# Altium PCB ST-LinkV2.PcbDoc
Units mm, origin at the board's own origin, x right, y up, seen from the top; angles counter-clockwise.
Board outline 48.5 x 21.03 mm, 2 copper layers (Top Layer, Bottom Layer); 39 components, 35 nets, 144 pads, 32 vias.
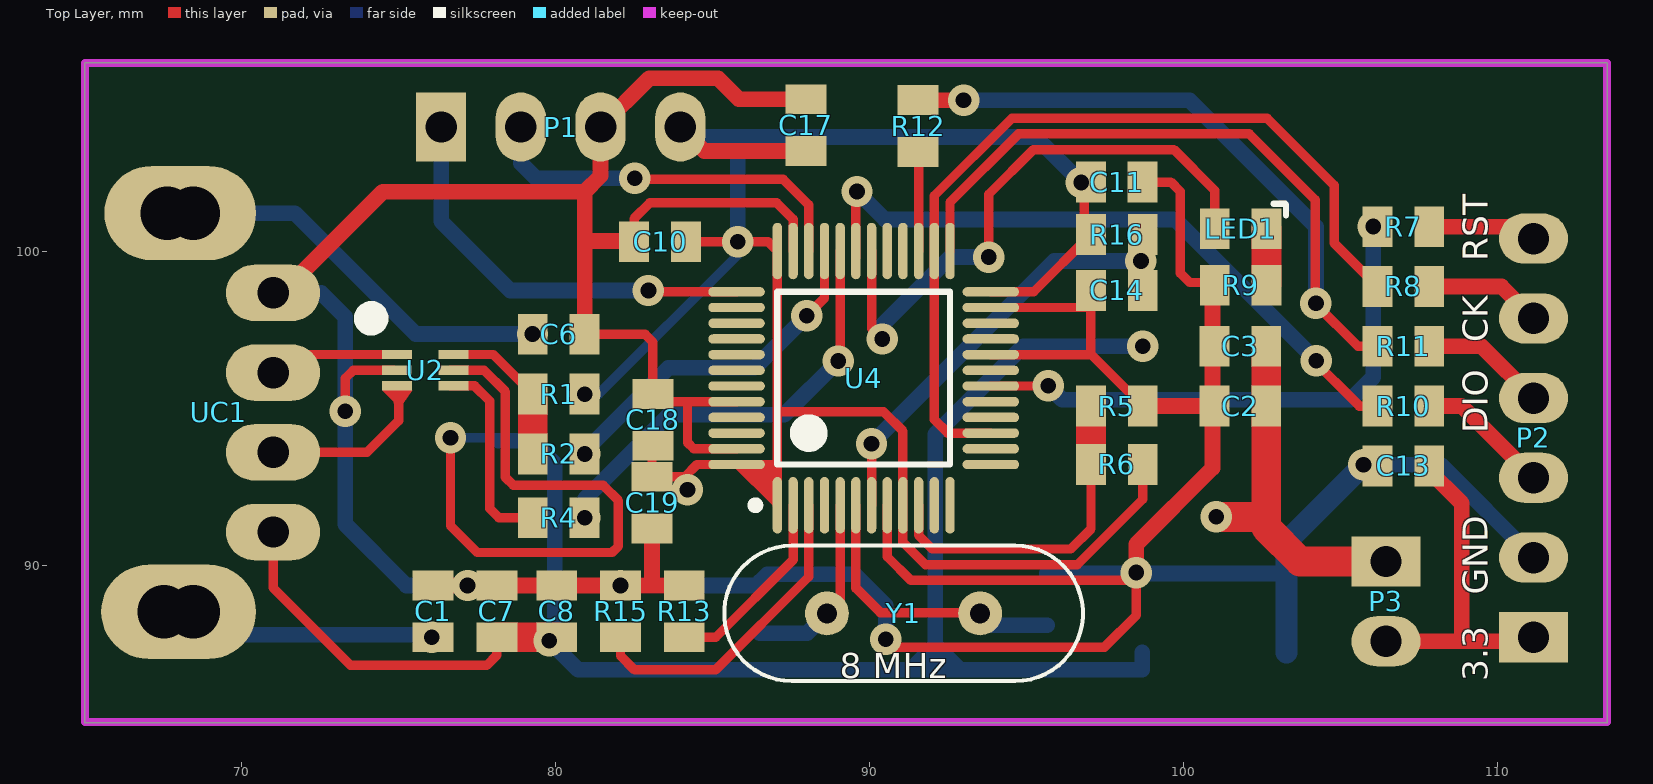
[diagram p0: Top Layer view]
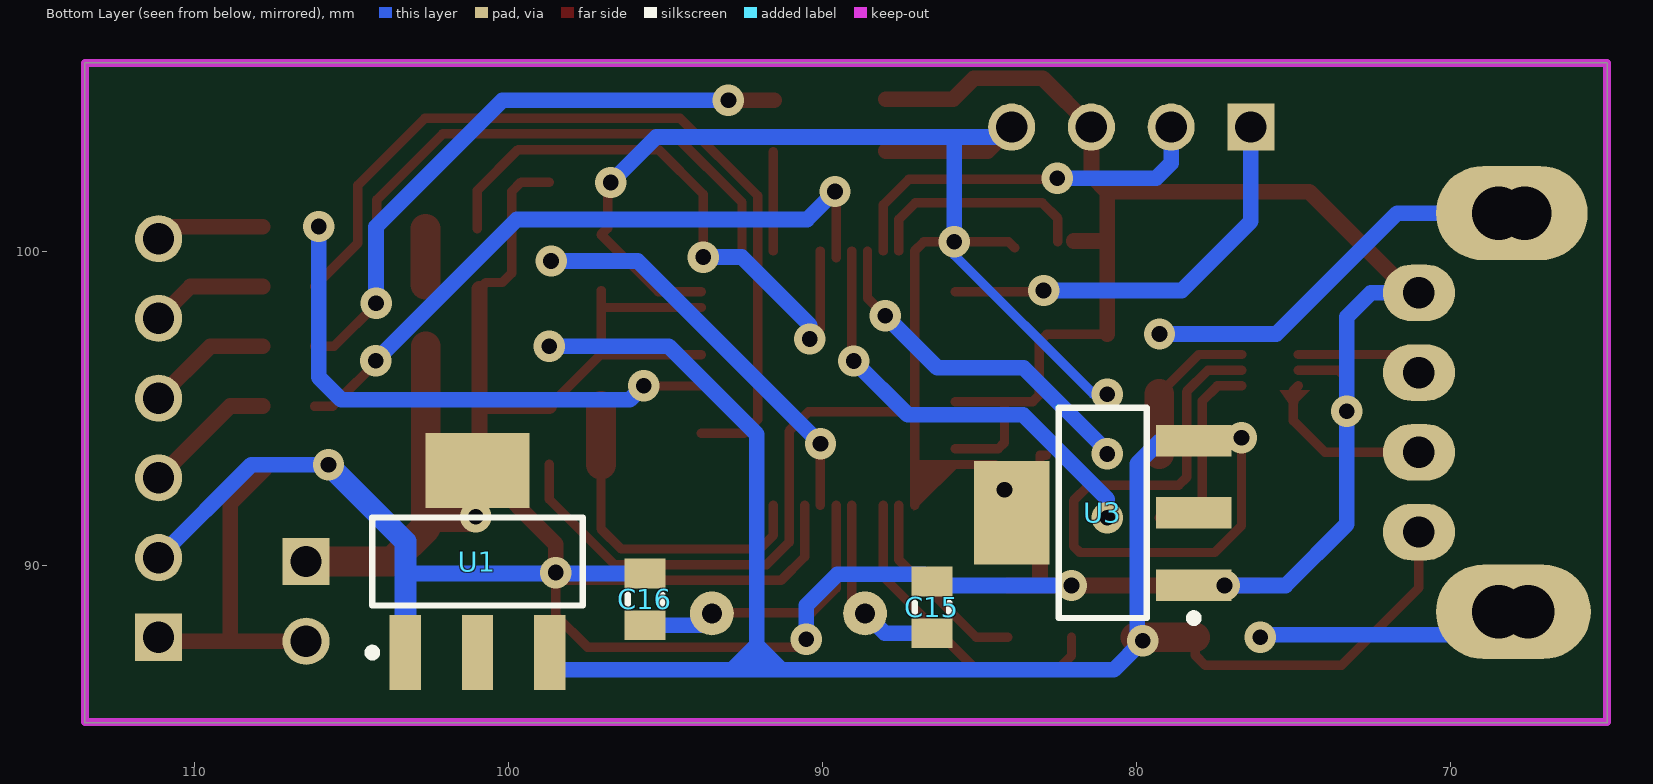
[diagram p1: Bottom Layer view, seen from below]
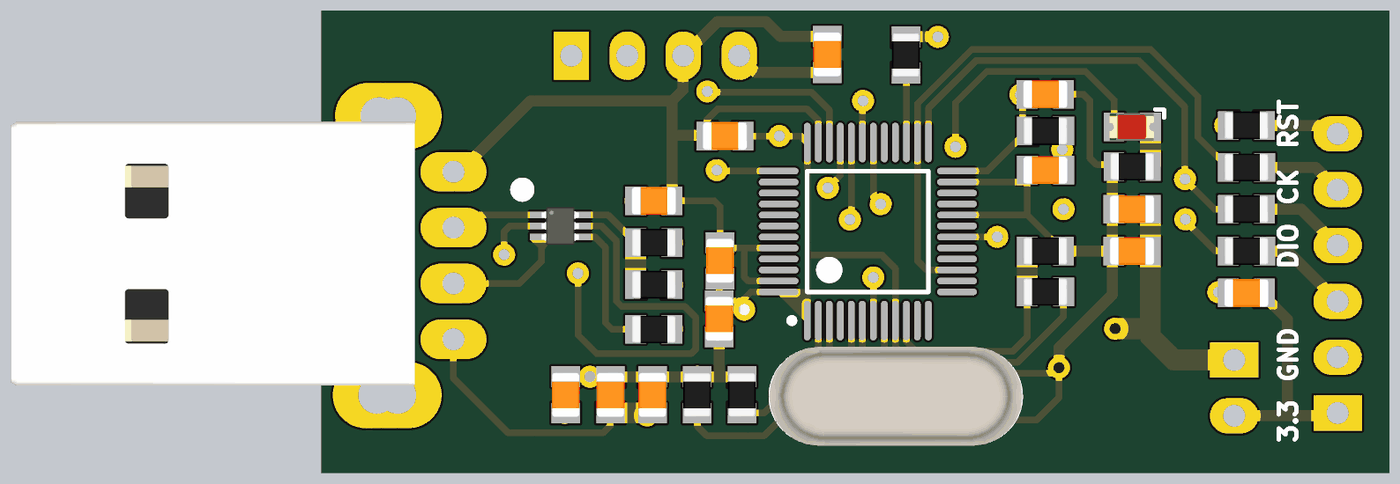
[diagram p2: 3D render of the assembled board from above, using the file's embedded part models]
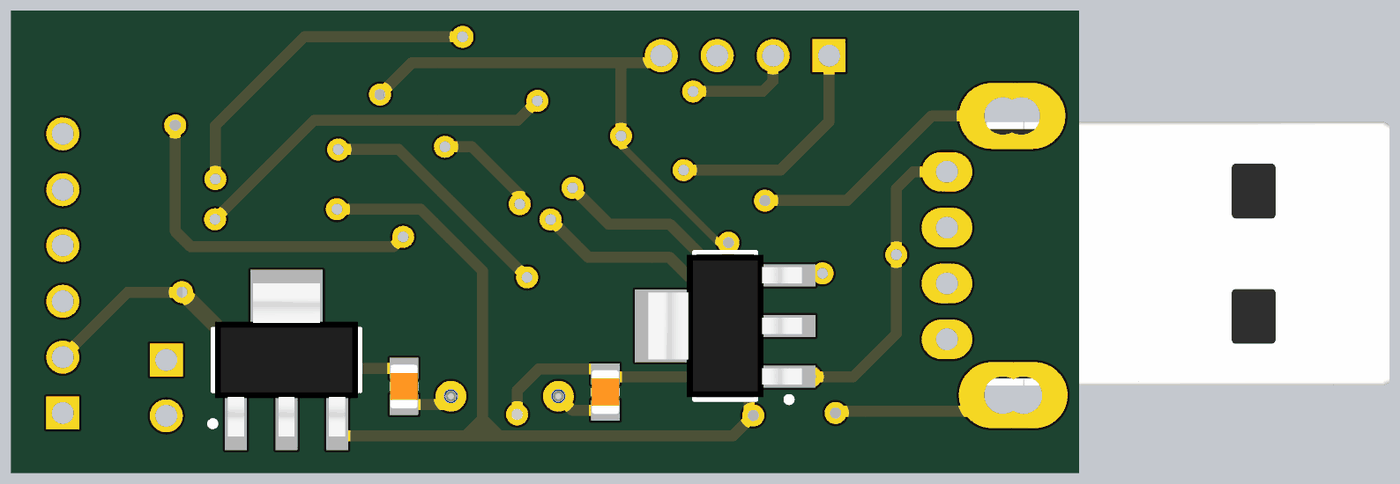
[diagram p3: 3D render of the assembled board from below, using the file's embedded part models]

## Layer stack, top to bottom
Top Solder: solder mask 0.0102, Solder Resist, Dk 3.5
Top Layer: signal copper 0.0356
Dielectric 1: dielectric 0.32, FR-4, Dk 4.8
Bottom Layer: signal copper 0.0356
Bottom Solder: solder mask 0.0102, Solder Resist, Dk 3.5

## Board outline
65,84.975 113.5,84.975 113.5,106 65,106

## Design rules (kind name [scope] priority, off if disabled: settings)
Clearance Clearance_2 [InPolygon] p1: gap=0.8 ignorepadtopadclearanceinfootprint=FALSE except(0: Arc-Hole Track-Hole SMDPad-Hole THPad-Hole Via-Hole Fill-Hole Poly-Hole Region-Hole Text-Hole)
Clearance Clearance_1 [(OnLayer('Keep-Out Layer'))] p2: gap=0 ignorepadtopadclearanceinfootprint=FALSE
Clearance [All] p3: gap=0.2 ignorepadtopadclearanceinfootprint=FALSE except(0: Arc-Hole Track-Hole SMDPad-Hole THPad-Hole Via-Hole Fill-Hole Poly-Hole Region-Hole Text-Hole)
ComponentClearance [All] p1 off: gap=0.254 collisioncheckmode=3 verticalgap=0.254 showdistances=FALSE
HoleSize [All] p1: absolutevalues=TRUE maxlimit=5 minlimit=0.025 maxpercent=80.000 minpercent=20.000
MinimumSolderMaskSliver [All] p1 off: minsoldermaskwidth=0.254
PolygonConnect [All] p1: connectstyle=Relief reliefconductorwidth=0.254 reliefentries=4 polygonreliefangle="90 Angle" airgapwidth=0.254
RoutingVias [All] p1: holewidth=0.6 width=0.9 viastyle="Through Hole" minholewidth=0.5 minwidth=0.7 maxholewidth=1.5 maxwidth=1.8
SilkToBoardRegionClearance [All] p1 off:
SilkToSilkClearance [All] p1 off: silktosilkclearance=0.254
SilkToSolderMaskClearance [IsPad] p1 off: minsilkscreentomaskgap=0.254 clearancetoexposedcopper=TRUE
SolderMaskExpansion [All] p1: expansion=0.102
Width [All] p1: maxlimit=5 minlimit=0.1 preferedwidth=0.3
24 further rules are at their usual default settings.

## Components (designator, comment, footprint, x,y, rotation, side; value= is the part's Value field where it differs from the comment)
C1 "100nF" SMD_CAP_0805 76.098,87.698 r90 top
C2 "100nf" SMD_CAP_0805 100.99,95.064 r0 top
C3 "10uf" SMD_CAP_0805 100.99,96.969 r0 top
C6 "100nF" SMD_CAP_0805 79.273,97.35 r0 top
C7 "10uf" SMD_CAP_0805 78.13,89.349 r270 top
C8 "10uf" SMD_CAP_0805 80.035,89.349 r270 top
C10 "100nf" SMD_CAP_0805 82.5,100.3 r0 top
C11 "10uf" SMD_CAP_0805 98.7,102.2 r180 top
C13 "10uf" SMD_CAP_0805 106.181,93.159 r0 top
C14 "100nf" SMD_CAP_0805 98.704,98.747 r180 top
C15 "20pf" SMD_CAP_0805 86.512,89.476 r270 bottom
C16 "20pf" SMD_CAP_0805 95.656,89.73 r270 bottom
C17 "100nf" SMD_CAP_0805 87.975,103.188 r90 top
C18 "100nf" SMD_CAP_0805 83.1,93.8 r90 top
C19 "100nf" SMD_CAP_0805 83.07,92.81 r270 top
LED1 "LED" LED0805 101.82,100.76 r0 top
P1 "Header 4" HDR1X4 76.352,103.954 r0 top
P2 "TargetSocket" HDR1X6 111.15,87.698 r90 top
P3 "Header 2" HDR1X2 106.451,90.111 r270 top
R1 "1.5k" "RES 0805 (2012X06L)" 79.273,95.445 r0 top
R2 "22" "RES 0805 (2012X06L)" 79.273,93.54 r0 top
R4 "22" "RES 0805 (2012X06L)" 79.273,91.508 r0 top
R5 "4.7k" "RES 0805 (2012X06L)" 97.053,95.064 r0 top
R6 "4.7k" "RES 0805 (2012X06L)" 98.704,93.207 r180 top
R7 "22" "RES 0805 (2012X06L)" 106.181,100.779 r0 top
R8 "22" "RES 0805 (2012X06L)" 107.832,98.874 r180 top
R9 "470" "RES 0805 (2012X06L)" 100.995,98.91 r0 top
R10 "22" "RES 0805 (2012X06L)" 107.832,95.064 r180 top
R11 "22" "RES 0805 (2012X06L)" 106.181,96.969 r0 top
R12 "100" "RES 0805 (2012X06L)" 91.545,104.81 r270 top
R13 "10k" "RES 0805 (2012X06L)" 84.099,89.349 r270 top
R15 "10k" "RES 0805 (2012X06L)" 82.067,89.349 r270 top
R16 "100k" "RES 0805 (2012X06L)" 98.704,100.525 r180 top
U1 "LM1117IMP-x.x" MP04A_N 100.99,90.111 r90 bottom
U2 "USBLC6-2" USBLC6-2 77.849,96.207 r0 top
U3 "LM1117IMP-x.x" MP04A_N 81.07,91.66 r0 bottom
U4 "STM32F103C8T6" STM-LQFP48_N 89.814,95.953 r90 top
UC1 "Usb-A" "USB A Connector" 64.922,94.81 r0 top
Y1 "8MHz" "XTAL Small" 91.084,88.46 r180 top

## Footprints (in the part's own frame and the unit in brackets; to place one, negate y for a bottom-side part, rotate by r counter-clockwise, add the part's x,y. Pads: shape width x height; smd on the part's side, far side on the other; paste and mask are expansions set on the pad)
HDR1X2 [mm] "Connector; Header; 2 Position"
  rect 1.6x2.2 / inner rect 1.5x1.5 / far side rect 1.5x1.5 hole 1: 1(0,0)
  oval 1.6x2.2 / inner round 1.5 / far side round 1.5 hole 1: 2(2.54,0)
HDR1X4 [mm] "Connector; Header; 4 Position"
  rect 1.6x2.2 / inner rect 1.5x1.5 / far side rect 1.5x1.5 hole 1: 1(0,0)
  oval 1.6x2.2 / inner round 1.5 / far side round 1.5 hole 1: 2(2.54,0) 3(5.08,0) 4(7.62,0)
HDR1X6 [mm] "Connector; Header; 6 Position"
  rect 1.6x2.2 / inner rect 1.5x1.5 / far side rect 1.5x1.5 hole 1: 1(0,0)
  oval 1.6x2.2 / inner round 1.5 / far side round 1.5 hole 1: 2(2.54,0) 3(5.08,0) 4(7.62,0) 5(10.16,0) 6(12.7,0)
LED0805 [mm]
  rect 0.95x1.3 smd: 1(-0.822,-0.047) 2(0.828,-0.047)
  silkscreen extent 1.05,0.38 1.45,0.75, body extent -1.03,-0.67 0.99,0.58, height 1.1
MP04A_N [mm] "SOT223, 4-Leads, Body 6.5x3.5mm, Pitch 2.3mm, Lead Span 7mm, IPC Medium Density"
  rect 2.4x1 smd: 1(-2.9,2.3) 2(-2.9,0) 3(-2.9,-2.3)
  rect 2.4x3.3 smd: 4(2.9,0)
  silkscreen extent -3.02,-3.35 1.4,3.48, body extent -3.49,-3.24 3.49,3.24, height 1.64
"RES 0805 (2012X06L)" [mm] "Chip Resistor, 2-Leads, Body 2.0x1.3mm, IPC High Density _ (0.100 W)"
  rect 0.95x1.3 smd: 1(0,0) 2(1.65,0)
  body extent -0.19,-0.63 1.84,0.64, height 0.6
SMD_CAP_0805 [mm]
  rect 0.95x1.3 smd: 1(0,0) 2(1.65,0)
  body extent -0.19,-0.63 1.84,0.63, height 0.65
STM-LQFP48_N [mm] "QFP, 48-Leads, Body 7x7mm, Pitch 0.5mm, IPC Medium Density"
  oval 1.8x0.3 smd: 1(-4.05,2.75) 2(-4.05,2.25) 3(-4.05,1.75) 4(-4.05,1.25) 5(-4.05,0.75) 6(-4.05,0.25) 7(-4.05,-0.25) 8(-4.05,-0.75) 9(-4.05,-1.25) 10(-4.05,-1.75) 11(-4.05,-2.25) 12(-4.05,-2.75) 25(4.05,-2.75) 26(4.05,-2.25) 27(4.05,-1.75) 28(4.05,-1.25) 29(4.05,-0.75) 30(4.05,-0.25) 31(4.05,0.25) 32(4.05,0.75) 33(4.05,1.25) 34(4.05,1.75) 35(4.05,2.25) 36(4.05,2.75)
  oval 0.3x1.8 smd: 13(-2.75,-4.05) 14(-2.25,-4.05) 15(-1.75,-4.05) 16(-1.25,-4.05) 17(-0.75,-4.05) 18(-0.25,-4.05) 19(0.25,-4.05) 20(0.75,-4.05) 21(1.25,-4.05) 22(1.75,-4.05) 23(2.25,-4.05) 24(2.75,-4.05) 37(2.75,4.05) 38(2.25,4.05) 39(1.75,4.05) 40(1.25,4.05) 41(0.75,4.05) 42(0.25,4.05) 43(-0.25,4.05) 44(-0.75,4.05) 45(-1.25,4.05) 46(-1.75,4.05) 47(-2.25,4.05) 48(-2.75,4.05)
  silkscreen extent -4.17,-2.75 2.75,3.57, body extent -3.5,-3.5 3.5,3.5, height 1.6
"USB A Connector" [mm]
  oval 3x1.8 / inner oval 2.3x1.8 / far side oval 2.3x1.8 hole 1: 1(6.077,-3.759) 2(6.077,-1.219) 3(6.077,1.321) 4(6.077,3.861)
  oval 4x3 hole 1.7: 5(2.7,6.4) 5(3.537,6.401) 6(2.6,-6.3) 6(3.537,-6.299)
  body extent -14.01,-5.86 4.32,6.13, height 4.5
USBLC6-2 [mm] "USB ESD Protectection"
  rect 0.95x0.3 smd: 1(-2.9,0.5) 2(-2.9,0) 3(-2.9,-0.5) 4(-1.1,-0.5) 5(-1.1,0) 6(-1.1,0.5)
  silkscreen extent -3.92,1.45 -3.52,1.85, body extent -2.85,-0.85 -1.15,0.85, height 0.6
"XTAL Small" [mil]
  round 55 hole 25: 1(-96.06,0) 2(96.06,0)
  silkscreen extent -225,-85 225,85, body extent -226,-89 226,89, height 140

## Part data
C1 C2 C3 C6 C7 C8 C10 C11 C13 C14 C15 C16 C17 C18 C19: library part Cap-Bipolar, "Bipolar Capacitor", Voltage=100V, Adding Date=1387/12/20, Designer="Saeid Jorablo", Organazation=ControTec
P1: "Header, 4-Pin", LatestRevisionDate=17-Jul-2002, LatestRevisionNote="Re-released for DXP Platform.", Publisher="Altium Limited"
P2: library part "Header 6", "Header, 6-Pin", LatestRevisionDate=17-Jul-2002, LatestRevisionNote="Re-released for DXP Platform.", Publisher="Altium Limited"
P3: "Header, 2-Pin", LatestRevisionDate=17-Jul-2002, LatestRevisionNote="Re-released for DXP Platform.", Publisher="Altium Limited"
R1 R2 R4 R5 R6 R7 R8 R9 R10 R11 R12 R13 R15 R16: library part Resistor, "Resistor", Power="1/8 W", Tolerance=5%
U1 U3: "x.x Volt, 800mA Low-Dropout Linear Regulator, 4-pin SOT-223", Manufacturer="National Semiconductor", PackageTopMarking=XYTT*N05B, PartNumber=LM1117IMP-3.3, PowerWise=N, Supplier Part Number 1=7614123, Code_IPC=SOT223-4, Code_JEDEC=TO-261-AA, ComponentLink1Description="LM1117 Datasheet", ComponentLink1URL=http://www.national.com/ds/LM/LM1117.pdf, ComponentLink2Description="LM1117 Web Page", ComponentLink2URL=http://www.national.com/pf/LM/LM1117.html, ComponentLink3Description="MP04A Package Page", ComponentLink3URL=http://www.national.com/packaging/folders/mp04a.html, CompType="LDO IC", DatasheetVersion=Apr-2006, PackageDescription="Molded SOT-223, 6.50 x 3.56 x 1.6mm Body, 4 Lead, 2.3mm Pitch", PackageReference=MP04A, PackageVersion="revB, Apr-2003", PinCount=4, Published=4-Dec-2008, Publisher="Altium Limited", RoHS=N, Supplier 1=Farnell
U2: "Very low capacitance ESD protection;2 data lines protection,Very low capacitance: 3.5 pF max,Protects VBU", Designer="Hamed Jafarzadeh"
U4: "ARM Cortex-M3 32-bit MCU, 64 KB Flash, 20 KB Internal RAM, 37 I/Os, 48-pin LQFP, -40 to 85 degC, Tray", I/Os (High Current)=37, Operating Frequency(F) (Processor speed) (MHz)=72, Supplier Part Number 1=497-6063-ND, Supply Voltage(Vcc) min (V)=2, A/D Converter="2x12-bit (10 Channel)", ComponentLink1Description="Manufacturer URL", ComponentLink1URL=http://www.st.com/web/en/home.html, ComponentLink2Description=Datasheet, ComponentLink2URL=http://www.st.com/st-web-ui/static/active/en/resource/technical/document/datasheet/CD00161566.pdf, ComponentLink3Description="Package Specification", ComponentLink3URL=http://www.st.com/st-web-ui/static/active/en/resource/technical/document/datasheet/DM00058181.pdf, Core="ARM Cortex-M3", DatasheetVersion="Rev. 16", FLASH Size (Prog) (kB)=64, Internal RAM Size (kB)=20, Mounting Technology="Surface Mount", PackageDescription="48-Pin Low Profile Quad Flat Package, 7 x 7 mm Body, 0.5 mm Pitch", PackageReference=LQFP48, PackageVersion="Rev. 6, 06/2013", Packing=Tray, PartNumber=STM32F103C8T6, Supplier 1=Digi-Key, Supplier 2=Farnell, Supplier 3=Newark, Supplier 4=Newark, Supplier 5=Mouser, Supplier Part Number 2=1447637, Supplier Part Number 3=59M2182, Supplier Part Number 4=57P1222, Supplier Part Number 5=511-STM32F103C8T6
UC1: library part USB, Designer=HamedJafarzadeh
Y1: library part XTAL, "XTAL Crystal", Company=E.P.I.L, Design Date=11/04/2011
LED1: Designer="Razi Research Team Of Mashhad - Hamed Jafarzadeh"

## Via types
v1: diameter 1, hole 0.5, Top Layer to Bottom Layer, 32 vias

## Nets (pads, with @x,y where several pads share a name; then routed paths per layer and width w, separated by ;. In a path a pad name is that pad's centre, name@x,y a point inside that pad or via, vN(x,y) a via of type N, cw(c..) or ccw(c..) an arc to the next point about the centre after c; other vN are vias at no path point)
+3V3: C10.2 C11.2 C17.1 C18.1 C19.1 P1.4 R1.2 R6.1 R16.2 U3.4 U4.1 U4.9 U4.24 U4.36 U4.48 | length 67.8
  Top Layer w0.3: v1(80.923,95.445) R1.2@81.26,95.445 ; C18.1@82.868,93.5 83.07,93.5 C19.1 v1@84.11,92.81 ; C10.2@83.877,100.103 84.074,100.3 C10.2 v1(85.8,100.3) 86.767,100.3 U4.36 87.064,94.885 ; v1(84.2,92.4) 84.11,92.49 v1@84.11,92.81 ; U4.48 84.503,93.203 v1@84.11,92.81 ; U4.1 87.064,94.885 ; U4.24 95.232,98.703 R16.2 96.845,100.734 96.845,102.085 v1(96.745,102.185) ; R6.1 98.704,92.094 96.62,90.01 91.783,90.01 91.064,90.729 U4.9 91.064,94.266 90.445,94.885 87.064,94.885
  Top Layer w0.5: P1.4 84.738,103.188 C17.1
  Bottom Layer w0.3: v1(80.923,95.445) 81.37,95.445 85.8,99.875 v1(85.8,100.3)
  Bottom Layer w0.5: P1.4 84.291,103.635 85.795,103.635 ; v1(85.8,100.3) 85.8,103.63 85.795,103.635 ; v1(96.745,102.185) 95.295,103.635 85.795,103.635
+5: C7.2 C8.2 U1.3 U2.5 U3.3 UC1.1 | length 75.7
  Top Layer w0.3: UC1.1 70.999,89.276 73.466,86.809 77.809,86.809 78.13,87.13 C7.2 ; v1(76.65,94.05) 76.65,91.25 77.5,90.4 81.8,90.4 82,90.6 82,92.051 81.511,92.54 78.653,92.54 78.4,92.793 78.4,95.525 77.718,96.207 U2.5 U2.5@76.649,96.207
  Top Layer w0.95: C7.2 C8.2
  Bottom Layer w0.3: v1(76.65,94.05) 78.08,94.05 U3.3
  Bottom Layer w0.5: U3.3 79.24,93.96 79.973,93.227 79.973,87.763 v1(79.795,87.585) 80.72,86.66 92.095,86.66 ; U1.3 98.69,86.66 92.095,86.66 ; v1(98.703,96.969) 94.899,96.969 92.095,94.165 92.095,86.66
GND: C1.2 C2.1 C3.1 C6.2 C7.1 C8.1 C10.1 C11.1 C13.1 C14.2 C15.1 C16.1 C17.2 C18.2 C19.2 P1.3 P2.2 R5.2 R9.1 R13.1 R15.1 U1.1 U2.2 U3.1 U4.8 U4.20 U4.23 U4.35 U4.44 U4.47 UC1.4 | length 148.9
  Top Layer w0.3: v1(73.3,94.9) 73.3,95.949 73.558,96.207 U2.2@74.849,96.207 ; C6.2@80.924,97.351 82.849,97.351 83.1,97.1 C18.2 ; C10.1 82.5,101.035 83,101.535 87.045,101.535 87.564,101.016 U4.35 ; C18.2@83.08,95.43 83.307,95.203 84.2,95.203 ; U4.47 84.397,93.703 84.2,93.9 84.2,95.203 ; U4.44 84.2,95.203 ; v1(90.52,87.635) 90.77,87.385 97.485,87.385 98.495,88.395 v1(98.495,89.76) ; U4.8 90.564,90.266 91.32,89.51 v1@98.245,89.51 ; U4.20 97.042,96.703 97.053,96.714 ; U4.23 C14.2@97.053,98.203 ; C14.2@97.053,98.746 C14.2@97.053,98.203 ; C11.1 99.6,102.2 99.9,101.9 99.9,99.3 100.2,99 100.718,99 R9.1@100.924,98.794 ; R5.2 97.053,96.714 ; 97.053,96.714 C14.2@97.053,98.203
  Top Layer w0.5: UC1.4 71.271,98.671 74.489,101.889 80.924,101.889 ; C1.2 76.099,89.349 C7.1 C8.1 v1(82.067,89.349) 83.125,89.349 ; C6.2@80.924,97.351 80.924,100.323 ; 81.992,100.323 80.924,100.323 ; C19.2 83.07,89.404 83.125,89.349 ; R13.1 83.125,89.349 ; C17.2 85.842,104.838 85.176,105.504 82.982,105.504 P1.3 81.432,102.397 80.924,101.889 ; v1(98.495,89.76) 98.495,90.664 100.924,93.093 C2.1@100.924,95.064 ; R5.2 C2.1@100.924,95.064 ; R9.1@100.924,98.794 C2.1@100.924,95.064 ; 80.924,100.323 80.924,101.889
  Bottom Layer w0.5: UC1.4 72.529,98.671 73.3,97.9 v1(73.3,94.9) 73.3,91.3 75.252,89.348 v1(77.195,89.348) ; v1(82.067,89.349) 86.385,89.349 C15.1 86.746,89.71 89.52,89.71 90.52,88.71 v1(90.52,87.635) ; C16.1 103.235,89.73 ; v1(105.735,93.195) 108.193,93.195 P2.2
  Bottom Layer w0.7: U1.1 103.29,90.75 v1(105.735,93.195)
LED_STLINK: LED1.1 U4.30 | length 19.2
  Top Layer w0.3: U4.30 90.064,97.536 v1(90.4,97.2) ; v1(93.795,99.81) 93.795,101.81 95.22,103.235 99.695,103.235 100.998,101.932 LED1.1
  Bottom Layer w0.5: v1(90.4,97.2) 90.4,97.64 92.57,99.81 v1(93.795,99.81)
MCO: U4.29
NetC1_1: C1.1 UC1.6 | length 8
  Top Layer w0.5: v1(76.057,87.698) C1.1
  Bottom Layer w0.5: UC1.6@68.459,88.511 69.19,87.78 75.975,87.78 v1(76.057,87.698)
NetC6_1: C6.1 UC1.5 | length 12.4
  Bottom Layer w0.5: UC1.5@68.459,101.211 71.689,101.211 75.54,97.36 v1(79.263,97.36)
NetC13_2: C13.2 P2.1 P3.2 | length 10.6
  Top Layer w0.5: P3.2 111.023,87.571 P2.1 ; C13.2@107.751,93.079 108.864,91.966 108.864,87.698
NetC15_2: C15.2 U4.5 Y1.2 | length 6
  Top Layer w0.3: Y1.2 89.064,88.88 U4.5
  Bottom Layer w0.5: C15.2 88.01,87.826 Y1.2
NetC16_2: C16.2 U4.6 Y1.1 | length 9.3
  Top Layer w0.3: U4.6 89.564,89.266 90.345,88.485 93.499,88.485 Y1.1
  Bottom Layer w0.3: Y1.1@93.497,88.487 Y1.1
  Bottom Layer w0.5: Y1.1 93.904,88.08 C16.2
NetLED1_2: LED1.2 R9.2 | length 1.8
  Top Layer w0.3: R9.2@102.648,98.932 R9.2@102.67,98.91
  Top Layer w0.95: R9.2@102.648,98.932 LED1.2
NetR1_1: R1.1 R2.1 U2.6 | length 5.1
  Top Layer w0.3: U2.6@76.649,96.707 78.011,96.707 R1.1
  Top Layer w0.95: R2.1 R1.1
NetR4_1: R4.1 U2.4 | length 6.4
  Top Layer w0.3: U2.4@76.649,95.707 U2.4 77.418,95.707 77.9,95.225 77.9,91.8 78.192,91.508 R4.1
NetR5_1: R5.1 R6.2 U4.10 | length 10.8
  Top Layer w0.3: U4.10 91.564,90.946 92,90.51 96.413,90.51 97.054,91.151 R6.2
  Top Layer w0.5: R5.1@97.054,95.063 R5.1
  Top Layer w0.95: R6.2 R5.1@97.054,95.063
NetR13_2: R13.2 U4.2 | length 6.2
  Top Layer w0.3: R13.2 85.099,87.699 87.564,90.164 U4.2
NetR15_2: R15.2 U4.3 | length 10.3
  Top Layer w0.3: R15.2 82.067,87.108 82.515,86.66 85.095,86.66 88.064,89.629 U4.3
NetU2_1: U2.1 UC1.3 | length 4.1
  Top Layer w0.3: UC1.3 71.575,96.707 U2.1@74.849,96.707
NetU2_3: U2.3 UC1.2 | length 5.6
  Top Layer w0.3: UC1.2 73.991,93.591 75,94.6 75,95.556 U2.3@74.849,95.707
RST: P2.6 R7.2 | length 3.5
  Top Layer w0.5: R7.2 110.769,100.779 P2.6
STM_JTCK: P1.1 U4.37 | length 13.3
  Top Layer w0.3: v1(82.956,98.747) 83,98.703 U4.37
  Bottom Layer w0.5: P1.1 76.352,100.948 78.553,98.747 v1(82.956,98.747)
STM_JTMS: P1.2 U4.34 | length 12.3
  Top Layer w0.3: v1(82.525,102.325) 82.565,102.285 87.252,102.285 88.064,101.473 U4.34
  Bottom Layer w0.5: P1.2 78.892,102.808 79.375,102.325 v1(82.525,102.325)
STM_RST: C14.1 R16.1 U4.7 | length 13
  Top Layer w0.3: U4.7 v1(90.064,93.866)
  Bottom Layer w0.5: v1(90.064,93.866) 95.883,99.685 v1(98.645,99.685)
SWCLK: P2.5 R8.1 | length 3.7
  Top Layer w0.5: R8.1 110.134,98.874 P2.5
SWDIO: P2.4 R11.2 | length 4
  Top Layer w0.5: R11.2 109.499,96.969 P2.4
SWO: P2.3 R10.1 | length 4.3
  Top Layer w0.5: R10.1 108.864,95.064 P2.3
T_JTCK: R8.2 U4.15 U4.26 | length 27.5
  Top Layer w0.3: U4.15 92.497,94.203 92.064,94.636 U4.26 92.064,101.761 94.538,104.235 102.665,104.235 104.8,102.1 104.8,100.256 R8.2
T_JTDI: U4.17
T_JTDO: U4.16
T_JTMS: R12.2 U4.27 | length 3.2
  Top Layer w0.3: U4.27 R12.2@91.564,103.16
T_NRST: R7.1 U4.18 | length 17.5
  Top Layer w0.3: U4.18 95.702,95.703 v1(95.695,95.71)
  Bottom Layer w0.5: v1(95.695,95.71) 96.14,95.265 105.33,95.265 106.045,95.98 v1(106.045,100.785)
T_SWDIO_IN: R11.1 R12.1 U4.25 | length 37.6
  Top Layer w0.3: U4.25 92.564,101.554 94.745,103.735 102.095,103.735 104.195,101.635 104.195,98.335 105.561,96.969 R11.1
  Top Layer w0.5: R12.1 v1(92.995,104.81)
  Bottom Layer w0.5: v1(92.995,104.81) 100.19,104.81 104.22,100.78 v1(104.22,98.34)
T_SWO: R10.2 U4.31 | length 22.1
  Top Layer w0.3: U4.31@89.564,99.785 U4.31 89.564,101.554 89.773,101.763 89.636,101.9 v1(89.6,101.9) ; v1@104.045,96.701 104.007,96.663 105.606,95.064 R10.2
  Bottom Layer w0.5: v1(89.6,101.9) 90.49,101.01 99.735,101.01 v1(104.235,96.51)
TARGETVCC: C2.2 C3.2 P3.1 U1.4 | length 11.6
  Top Layer w0.95: v1(101.045,91.535) 102.64,91.535 ; C3.2 C2.2 102.64,91.535 ; P3.1 103.714,90.111 102.64,91.185 102.64,91.535
USB_DM: R4.2 U4.32 | length 14
  Top Layer w0.3: v1(89,96.5) 89.064,96.564 U4.32
  Bottom Layer w0.5: v1(80.923,91.508) 80.923,92.099 83.609,94.785 87.285,94.785 v1(89,96.5)
USB_DP: R2.2 U4.33 | length 11.2
  Top Layer w0.3: v1(88,97.94) 88.564,98.504 U4.33
  Bottom Layer w0.5: v1(80.923,93.54) 80.923,93.615 83.593,96.285 86.345,96.285 v1(88,97.94)
pads on no net: U1.2 U3.2 U4.4 U4.11 U4.12 U4.13 U4.14 U4.19 U4.21 U4.22 U4.28 U4.38 U4.39 U4.40 U4.41 U4.42 U4.43 U4.45 U4.46

## Keep-outs
Keep-Out Layer:
  lines w0.254: 65,85 65,106 113.5,106 113.5,85 65,85

## Other copper
Top Layer:
  region: 75.45,95.05
  region net NetU2_3: 75.425,95.575 74.475,95.575 74.85,95.2 74.85,95.15 75.15,95.15
  region net +3V3: 85.474,93.345 87.095,91.724 87.095,93.345
Bottom Layer:
  region net +5: 92.095,87.795 91.135,86.835 93.055,86.835

## Silkscreen, mask and mechanical layers (free items; w line width, h text height)
Top Overlay:
  text "RST" at 109.7,99.676 h0.8 r90
  text "CK" at 109.7,97.101 h0.8 r90
  text "DIO" at 109.7,94.201 h0.8 r90
  text "GND" at 109.7,89.051 h0.8 r90
  text "8 MHz" at 89.05,86.4 h0.8
  text "3.3" at 109.7,86.301 h0.8 r90